# EAGLE board Water_level_board (EAGLE 9.6.2)
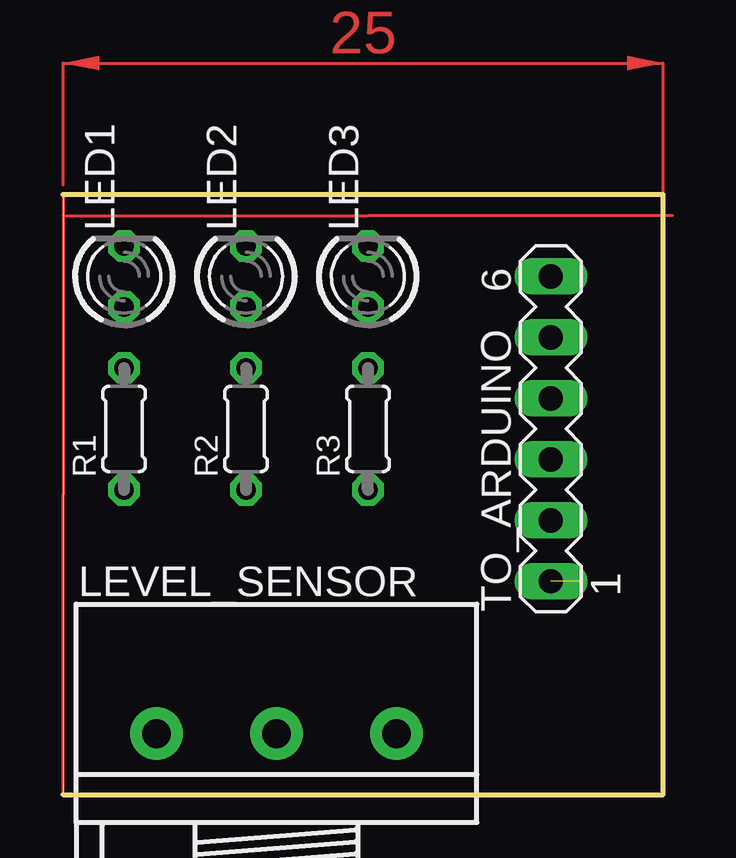
[diagram p0: board, top side]
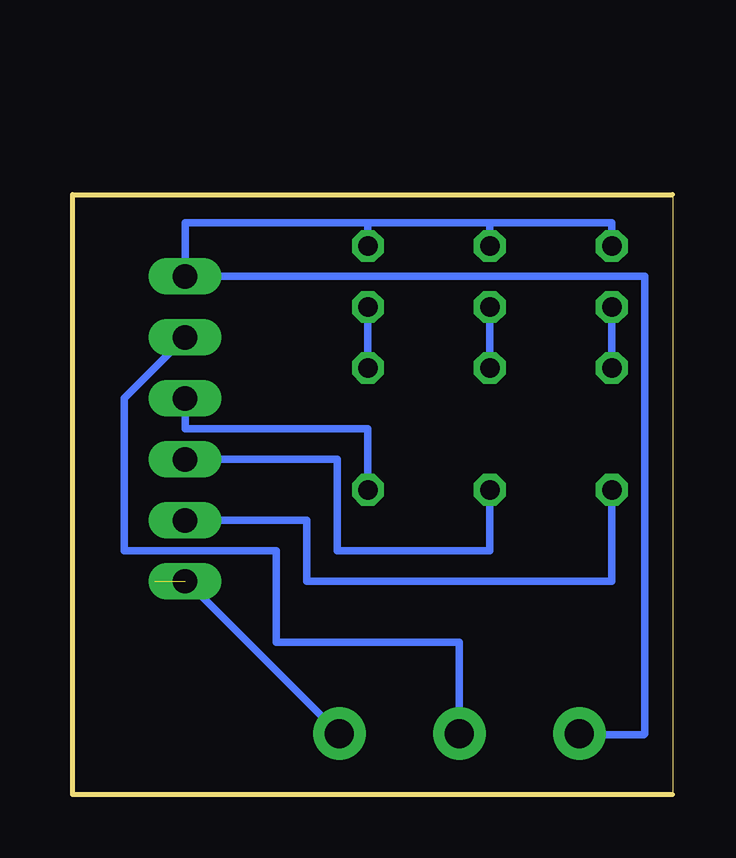
[diagram p1: board, bottom side, seen from below]

Size 25 x 25 mm. Coordinates in mm from the lower left corner, seen from the top.
Outline: 0,0 25,0 25,25 0,25 0,0
Copper layers (1*16): Top 0.035mm / dielectric 1.5mm / Bottom 0.035mm
Design rules "default": minimum track width 6mil, minimum drill 0.35mm, track to track 6mil, track to pad 6mil, pad to pad 6mil, via to via 6mil, smd to smd 6mil, copper to edge 40mil, drill to drill 6mil, minimum pad ring 10mil, minimum via ring 8mil, stop-mask expansion 4mil, vias tented up to drill 0mil, thermal gap 10mil

## Footprints (pad centres in the part's own frame; a part is rotated, then mirrored left to right if it is on the bottom)
LED3MM = drill 0.813 octagon: A -1.27,0; K 1.27,0
3RP/1610N = drill 1.2 pad 2.184: 1 -5,0; 2 0,0; 3 5,0
0204/5 = drill 0.813 octagon: 1 -2.54,0; 2 2.54,0
MA06-1 = drill 1.016 long: 1 -6.35,0; 2 -3.81,0; 3 -1.27,0; 4 1.27,0; 5 3.81,0; 6 6.35,0

## Placement (x,y rotation side)
LED1  [LED3MM]  2.54,21.59 90 top
LED2  [LED3MM]  7.62,21.59 90 top
LED3  [LED3MM]  12.7,21.59 90 top
LEVEL_SENSOR  [3RP/1610N]  8.89,2.54 0 top
R1  [0204/5]  2.54,15.24 90 top
R2  [0204/5]  7.62,15.24 90 top
R3  [0204/5]  12.7,15.24 90 top
TO_ARDUINO  [MA06-1]  20.32,15.24 90 top

## Library data of the parts
LED1-LED3 = led
LEVEL_SENSOR = pot
R1-R3 = rcl; SPICEPREFIX: R
TO_ARDUINO = con-lstb; OC_FARNELL: unknown; OC_NEWARK: unknown

## Nets
N$1: R2.1 TO_ARDUINO.3
N$2: LEVEL_SENSOR.2 TO_ARDUINO.5
N$3: R3.1 TO_ARDUINO.4
N$4: LED1.A R1.2
N$5: LED2.A R2.2
N$7: R1.1 TO_ARDUINO.2
N$8: LEVEL_SENSOR.3 TO_ARDUINO.1
N$9: LED3.A R3.2
N$11: LED1.K LED2.K LED3.K LEVEL_SENSOR.1 TO_ARDUINO.6

## Tracks (layer width: path | path; a pad name or v marks a point on that pad's centre or on a via)
N$1
  Bottom 0.305: TO_ARDUINO.3 13.97,13.97 13.97,10.16 7.62,10.16 R2.1
N$2
  Bottom 0.305: TO_ARDUINO.5 22.86,16.51 22.86,10.16 16.51,10.16 16.51,6.35 8.89,6.35 LEVEL_SENSOR.2
N$3
  Bottom 0.305: R3.1 12.7,15.24 20.32,15.24 TO_ARDUINO.4
N$4
  Bottom 0.305: LED1.A R1.2
N$5
  Bottom 0.305: LED2.A R2.2
N$7
  Bottom 0.152: TO_ARDUINO.2 20.32,11.81
  Bottom 0.305: TO_ARDUINO.2 15.24,11.43 15.24,8.89 2.54,8.89 R1.1
N$8  (1 unrouted)
  Bottom 0.305: LEVEL_SENSOR.3 20.24,8.89 21.59,8.89
N$9
  Bottom 0.305: LED3.A R3.2
N$11
  Bottom 0.152: 3.81,2.46 3.85,2.5 LEVEL_SENSOR.1
  Bottom 0.305: LED1.K 2.54,23.83 7.62,23.83 | 7.62,23.83 12.7,23.83 | 12.7,23.83 20.32,23.83 TO_ARDUINO.6 1.17,21.59 1.17,2.54 1.21,2.5 3.85,2.5 | LED2.K 7.62,23.83 | LED3.K 12.7,23.83
(copper drawn outside any net)
  shapes: Top area x3